# Altium PCB HandPCB.PcbDoc
Units mil, origin at the board's own origin, x right, y up, seen from the top; angles counter-clockwise.
Board outline 3543.31 x 1181.1 mil, 2 copper layers (Top Layer, Bottom Layer); 30 components, 21 nets, 97 pads, 13 vias.
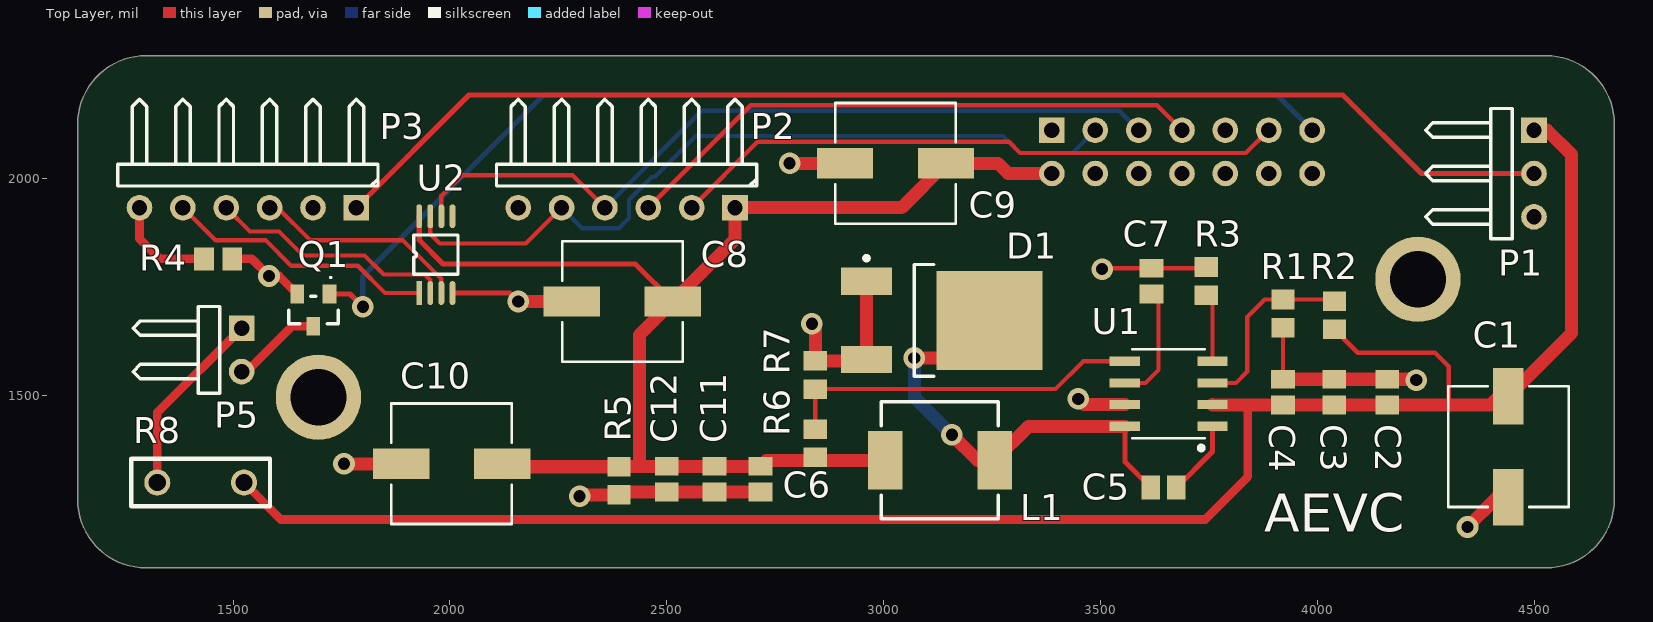
[diagram p0: Top Layer view]
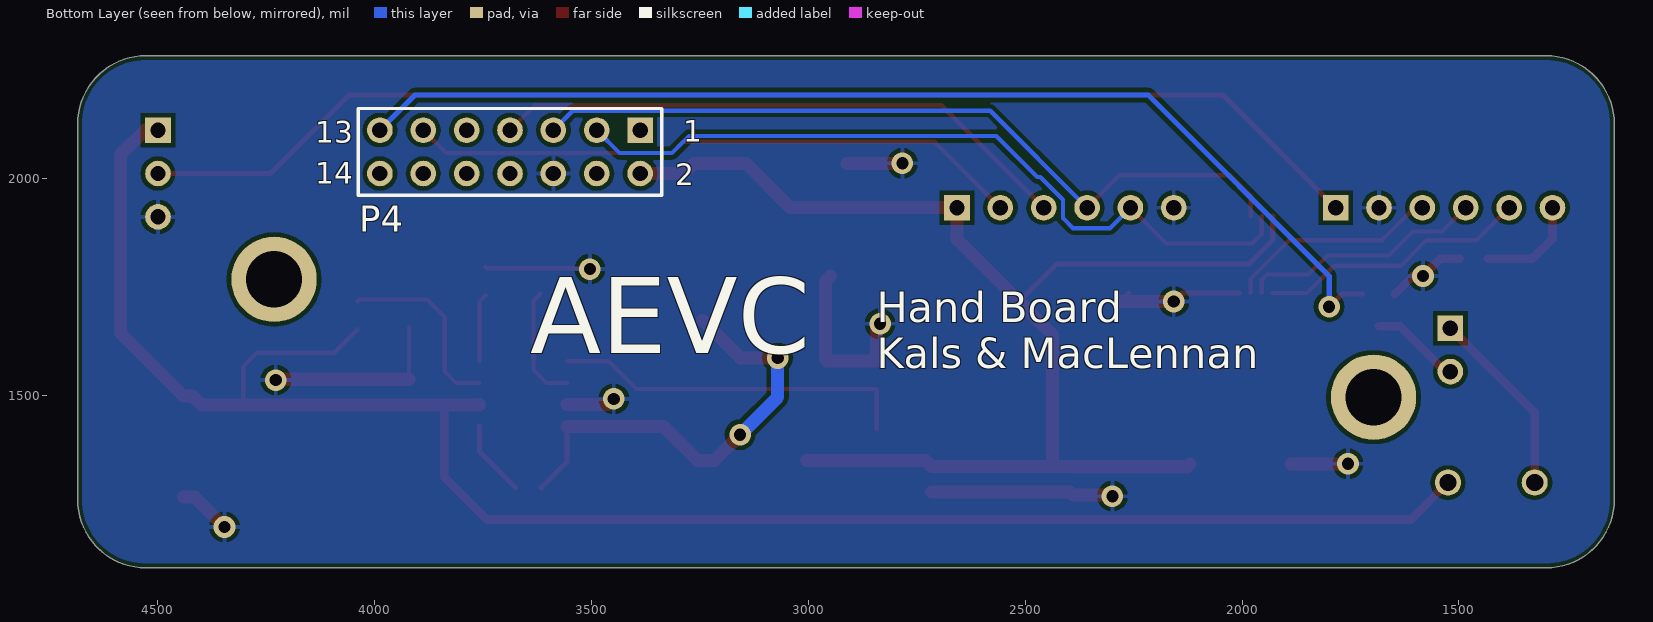
[diagram p1: Bottom Layer view, seen from below]

## Layer stack, top to bottom
Top Solder: solder mask 0.4, Solder Resist, Dk 3.5
Top Layer: signal copper 1.4
Dielectric 1: dielectric 12.6, FR-4, Dk 4.8
Bottom Layer: signal copper 1.4
Bottom Solder: solder mask 0.4, Solder Resist, Dk 3.5

## Board outline
1141.73,1259.84 ccw(c1299.21,1259.84) 1299.21,1102.36 4527.56,1102.36 ccw(c4527.56,1259.84) 4685.04,1259.84 4685.04,2125.98 ccw(c4527.56,2125.98) 4527.56,2283.46 1299.21,2283.46 ccw(c1299.21,2125.98) 1141.73,2125.98

## Design rules (kind name [scope] priority, off if disabled: settings)
BoardOutlineClearance [All] p1: gap=10 ignorepadtopadclearanceinfootprint=FALSE except(0: Arc-SplitContinuation Track-SplitContinuation SMDPad-SplitContinuation THPad-SplitContinuation Via-SplitContinuation Fill-SplitContinuation Poly-SplitContinuation Region-SplitContinuation Text-SplitContinuation)
Clearance [All] p1: gap=10 ignorepadtopadclearanceinfootprint=FALSE except(0: Arc-Hole Track-Hole SMDPad-Hole THPad-Hole Via-Hole Fill-Hole Poly-Hole Region-Hole Text-Hole)
PolygonConnect [All] p1: connectstyle=Relief reliefconductorwidth=10 reliefentries=4 polygonreliefangle="90 Angle" airgapwidth=10
RoutingVias [All] p1: holewidth=28 width=50 viastyle="Through Hole" minholewidth=28 minwidth=50 maxholewidth=28 maxwidth=50
SolderMaskExpansion [All] p1: expansion=4
Width [All] p1: maxlimit=60 minlimit=10 preferedwidth=10
30 further rules are at their usual default settings.

## Classes and differential pairs
component class U_POS5V: C10 C11 C12 R5 R6 R7
component class U_LMR14050_mod: C1 C2 C3 C4 C5 C6 C7 D1 L1 R1 R2 R3 U1
component class Main: C8 C9 P1 P2 P3 P4 P5 Q1 R4 R8 U2

## Components (designator, comment, footprint, x,y, rotation, side; value= is the part's Value field where it differs from the comment)
C1 "EEEFK1V680XP" CAP_EEFK_D8 4440.94,1381.89 r270 top value=82uF
C2 "Cap" C0805 4161.42,1507.87 r270 top value=10µF
C3 "Cap" C0805 4039.37,1507.87 r270 top value=10µF
C4 "Cap" C0805 3921.26,1507.87 r270 top value=0.1µF
C5 "Cap" C0805 3645.67,1287.4 r0 top value=0.1µF
C6 "Cap" C0805 2716.54,1307.09 r90 top value=0.1µF
C7 "Cap" C0805 3618.11,1763.78 r270 top value=22µF
C8 "EEEFK1V680XP" CAP_EEFK_D8 2397.64,1716.54 r180 top value=82uF
C9 "EEEFK1V680XP" CAP_EEFK_D8 3027.56,2035.43 r180 top value=82uF
C10 "EEEFK1V680XP" CAP_EEFK_D8 2003.94,1342.52 r180 top value=82uF
C11 "Cap" C0805 2610.24,1307.09 r90 top value=10µF
C12 "Cap" C0805 2500,1307.09 r90 top value=10µF
D1 "MBRD835LG" ONSC-DPAK-3-369C-01_V 3133.86,1673.23 r0 top
L1 "Ind" IHLP-2525C7 3129.92,1350.39 r180 top value=3.3µH
P1 "Header 3H" HDR1X3H 4500,2111.81 r270 top
P2 "Header 6H" HDR1X6H 2657.48,1933.07 r180 top
P3 "Header 6H" HDR1X6H 1784.25,1933.07 r180 top
P4 "Header 7X2" HDR2X7 3388.19,2111.81 r0 bottom
P5 "Header 2H" HDR1X2H 1519.69,1655.12 r270 top
Q1 "ZXMS6004FFTA" DIOD-SOT23F-3_V 1685.04,1696.85 r270 top
R1 "Res" R0805 4039.37,1685.04 r270 top value=39k
R2 "Res" R0805 3921.26,1688.98 r90 top value=10k
R3 "Res" R0805 3744.09,1763.78 r270 top value=33k
R4 "Res" R0805 1465.55,1814.96 r180 top value=1k
R5 "Res" R0805 2389.76,1303.15 r90 top value=1k
R6 "Res" R0805 2842.52,1389.76 r270 top value=15k
R7 "Res" R0805 2842.52,1547.24 r270 top value=2.7k
R8 "Power Resistor" MP915 1425.2,1299.21 r0 top
U1 "LMR14050SDDAR" DDA8 3657.48,1503.94 r180 top value=Value
U2 "PCA9553DP" TSSOP8 1929.13,1736.22 r90 top

## Footprints (in the part's own frame and the unit in brackets; to place one, negate y for a bottom-side part, rotate by r counter-clockwise, add the part's x,y. Pads: shape width x height; smd on the part's side, far side on the other; paste and mask are expansions set on the pad)
C0805 [mm] "Chip Capacitor, Body 2.0x1.3mm, IPC High Density"
  rect 1.1x1.4 smd: 1(-0.75,0) 2(0.75,0)
  body extent -1.1,-0.72 1.1,0.72, height 1.4
CAP_EEFK_D8 [mil]
  rect 130x70 smd paste+0 mask+0: 1(-116.5,0) 2(116.5,0)
  silkscreen extent -139,-139 139,139, body extent -154,-134 154,134, height 317
DDA8 [mil]
  rect 70x21 smd paste+0 mask+0: 1(-101,75) 2(-101,25) 3(-101,-25) 4(-101,-75) 5(101,-75) 6(101,-25) 7(101,25) 8(101,75)
  silkscreen extent -84,-103 84,130, body extent -122,-100 122,100, height 66
DIOD-SOT23F-3_V [mm] "SOTFL, 3-Leads, Body 2.9x1.6mm, Pitch 0.95mm"
  rect 1.11x0.8 smd: 1(-0.945,0.95) 2(-0.945,-0.95) 3(0.945,0)
  silkscreen extent -1.96,-1.45 0.8,1.45, body extent -1.2,-1.45 1.2,1.45, height 1
HDR1X2H [mm] "Connector; Header; 2 Position; Right Angle"
  rect 1.5x1.5 hole 0.9: 1(0,0)
  round 1.5 hole 0.9: 2(2.54,0)
  silkscreen extent -1.27,-6.35 3.81,-1.27
HDR1X3H [mm] "Connector; Header; 3 Position; Right Angle"
  rect 1.5x1.5 hole 0.9: 1(0,0)
  round 1.5 hole 0.9: 2(2.54,0) 3(5.08,0)
  silkscreen extent -1.27,-6.35 6.35,-1.27
HDR1X6H [mm] "Connector; Header; 6 Position; Right Angle"
  rect 1.5x1.5 hole 0.9: 1(0,0)
  round 1.5 hole 0.9: 2(2.54,0) 3(5.08,0) 4(7.62,0) 5(10.16,0) 6(12.7,0)
  silkscreen extent -1.27,-6.35 13.97,-1.27
HDR2X7 [mm] "Connector; Header; 7x2 Position"
  rect 1.5x1.5 hole 0.9: 1(0,0)
  round 1.5 hole 0.9: 2(0,2.54) 3(2.54,0) 4(2.54,2.54) 5(5.08,0) 6(5.08,2.54) 7(7.62,0) 8(7.62,2.54) 9(10.16,0) 10(10.16,2.54) 11(12.7,0) 12(12.7,2.54) 13(15.24,0) 14(15.24,2.54)
  silkscreen extent -1.27,-1.27 16.51,3.81
IHLP-2525C7 [mm]
  rect 2.02x3.429 smd: 1(-3.2,0) 2(3.2,0)
  silkscreen extent -3.43,-3.43 3.43,3.43, body extent -3.54,-3.3 3.54,3.37, height 2.89
MP915 [mil]
  round 60 hole 40: 1(-100,0) 2(100,0)
  silkscreen extent -160,-55 160,55
ONSC-DPAK-3-369C-01_V [mm] "DPAK, 3-Leads, Body 6.54x6.095mm, Pitch 2.29mm"
  rect 3x1.6 smd: 1(-4.4,2.29) 3(-4.4,-2.29)
  rect 6.2x5.8 smd: 4(2.8,0)
  silkscreen extent -4.52,-3.27 -0.45,3.76, body extent -1.6,-3.27 4.49,3.27, height 2.38
R0805 [mm]
  rect 1.15x1.35 smd: 1(-0.825,0) 2(0.825,0)
  body extent -1.05,-0.67 1.05,0.67, height 0.9
TSSOP8 [mm]
  rect 1.4x0.34 smd: 1(0,0)
  oval 1.4x0.34 smd: 2(0,-0.65) 3(0,-1.3) 4(0,-1.95) 5(4.5,-1.95) 6(4.5,-1.3) 7(4.5,-0.65) 8(4.5,0)
  silkscreen extent 1.1,-2.28 3.4,0.33

## Part data
C1 C8 C9 C10: "Polarized Capacitor (Surface Mount)", Supplier Part Number 1=P18960DKR-ND, Built_By=EMA_UL_Team, C="Copyright (C) 2015 Accelerated Designs. All rights reserved", Manufacturer_Part_Number=EEEFK1V680XP, Supplier 1=Digi-Key, Vendor=Panasonic
C2 C3 C4 C5 C6 C7 C11 C12: "capacitor"
D1: library part CMP-1055-00169-1, "SWITCHMODE(TM) Power Rectifier, 3-Pin DPAK, Pb-Free, Tube", Manufacturer="On Semiconductor", ComponentLink1Description="Manufacturer URL", ComponentLink1URL=http://www.onsemi.com/, ComponentLink2Description=Datasheet, ComponentLink2URL=http://www.onsemi.cn/pub_link/Collateral/MBRD835L-D.PDF, ComponentLink3Description="Package Specification", ComponentLink3URL=http://www.onsemi.cn/pub_link/Collateral/369C.PDF, Configuration=Single, DatasheetVersion="Rev. 11", IFSM Max (A)=75, Mounting Technology="Surface Mount", PackageDescription="3-Pin Flange Mount, Body 6.54 x 6.095 mm, Pitch 2.29 mm", PackageReference=DPAK-3-369C-01, PackageVersion="Rev. E, 02/2014", Packing=Tube, PartNumber=MBRD835LG, RoHS=TRUE
L1: "Inductor", Supplier Part Number 1=541-2580-1-ND, Supplier 1=Digi-Key
P1: "Header, 3-Pin, Right Angle", LatestRevisionDate=17-Jul-2002, LatestRevisionNote="Re-released for DXP Platform.", Publisher="Altium Limited"
P2 P3: "Header, 6-Pin, Right Angle", LatestRevisionDate=17-Jul-2002, LatestRevisionNote="Re-released for DXP Platform.", Publisher="Altium Limited"
P4: "Header, 7-Pin, Dual row", LatestRevisionDate=17-Jul-2002, LatestRevisionNote="Re-released for DXP Platform.", Publisher="Altium Limited"
P5: "Header, 2-Pin, Right Angle", LatestRevisionDate=17-Jul-2002, LatestRevisionNote="Re-released for DXP Platform.", Publisher="Altium Limited"
Q1: library part CMP-2000-07435-1, "N-Channel Self Protected Enhancement Mode Intellifet(TM) MOSFET, 60 V, 1.3 A, -40 to 150 degC, 3-Pin SOT23, RoHS, Tape and Reel", Current - Output (Max)=1.3A, Manufacturer="Diodes Inc", Operating Temperature=-40°C~150°C(TJ), Package / Case=SOT-23-3FlatLeads, Package Description="3-Pin Small Outline Transistor Flat Lead, Body 2.9 x 1.6 mm, Pitch 0.95 mm", Package Reference=SOT23F-3, Standard Package=3,000, Supplier Device Package=SOT-23F, Voltage - Load=60V(Max), Voltage - Supply (Vcc/Vdd)=3.3V,5V, Category=IntegratedCircuits(ICs), Datasheet URL=https://datasheet.ciiva.com/15109/getdatasheetpartid-411522-15109086.pdf, Datasheet Version="Rev. 6-2, 10/2014", Family=PMIC-PowerDistributionSwitches,LoadDrivers, Fault Protection=CurrentLimiting(Fixed),OverTemperature,OverVoltage, Featured Product=ZXMS6004FF60VN-ChannelMOSFET, Features=AutoRestart, Input Type=Non-Inverting, Interface=On/Off, Manufacturer URL=http://www.diodes.com/, Mounting Technology=SurfaceMount, Number of Outputs=1, Online Catalog=GeneralPurpose, Other Names=ZXMS6004FFTR, Output Configuration=LowSide, Output Type=N-Channel, Packaging=Tape&Reel(TR), PCN Design/Specification=PartMarkingUpdate25/Sep/2015, Product Training Modules=IntelliFET's, Ratio - Input=Output:1:1, Rds On (Typ)=350mOhm, RoHS Information=RoHSCertofCompliance, Series=Automotive,AEC-Q101,INTELLIFET®, Switch Type=GeneralPurpose
R1 R2 R3 R4 R5 R6 R7: "resistor"
R8: library part MP915-40.0-1%, Supplier Part Number 1=MP915-40.0F-ND, Supplier 1=Digi-Key
U1: "dc-dc converter", Supplier Part Number 1=296-41103-5-ND, Built_By=EMA_UL_Team, C="Copyright (C) 2016 Accelerated Designs. All rights reserved", Manufacturer_Part_Number=LMR14050SDDAR, RefDes=RefDes, Supplier 1=Digi-Key, Type=Type, Vendor="Texas Instruments"
U2: "LED Driver, I2C", Supplier Part Number 1=568-3392-6-ND, Supplier 1=Digi-Key

## Free pads (board coordinates)
  round 196.85 hole 129.92 unplated: 1(1696.85,1496.06) 1(4232.28,1767.72)

## Via types
v1: diameter 50, hole 28, Top Layer to Bottom Layer, 13 vias

## Nets (pads, with @x,y where several pads share a name; then routed paths per layer and width w, separated by ;. In a path a pad name is that pad's centre, name@x,y a point inside that pad or via, vN(x,y) a via of type N, cw(c..) or ccw(c..) an arc to the next point about the centre after c; other vN are vias at no path point)
EN: P2.2 P4.11 | length 1426.6
  Top Layer w10: P2.2 2709.84,2085.43 3288.58,2085.43 3314.96,2059.06 3835.43,2059.06 P4.11
GND: C1.2 C2.1 C3.1 C4.1 C6.1 C7.1 C8.2 C9.2 C10.2 C11.1 C12.1 D1.1 D1.3 P1.3 P2.6 P3.2 P4.6 Q1.2 R2.1 R3.1 R4.1 R5.1 R7.1 U1.7 U2.4 | length 2485.7
  Top Layer w10: v1(3503.94,1791.34) 3505.91,1793.31 C7.1 3741.14,1793.31 R3.1 ; C4.1 R2.1
  Top Layer w12: U2.4 2137.8,1736.22 v1(2157.48,1716.54) ; C8.2@2261.45,1736.22 C8.2
  Top Layer w20: R4.1 1543.31,1814.96 v1(1582.68,1775.59) 1606.1,1775.59 Q1.2
  Top Layer w30: v1(1755.91,1342.52) C10.2 ; v1(2157.48,1716.54) C8.2 ; v1(2299.21,1267.72) 2302.17,1270.67 R5.1 2396.65,1277.56 C12.1 C11.1 C6.1 ; v1(2783.46,2035.43) C9.2 ; v1(2834.65,1665.35) 2842.52,1657.48 R7.1 2957.28,1579.72 D1.3 D1.1 D1.1@2948.62,1775.39 ; v1(3448.82,1492.13) 3462.01,1478.94 U1.7 ; C4.1 C3.1 C2.1 4226.38,1537.4 v1(4228.35,1535.43) ; v1(4346.46,1196.85) 4415,1265.39 C1.2
I2C_SCL: P2.4 P4.5 U2.6 | length 1816.6
  Top Layer w10: U2.6 1980.32,1960.63 2027.56,2007.87 2282.68,2007.87 P2.4
  Bottom Layer w10: P2.4 2580.75,2156.34 3543.66,2156.34 P4.5
I2C_SDA: P2.5 P4.3 U2.7 | length 1788.7
  Top Layer w10: U2.7 1954.72,1872.05 1976.38,1850.39 2174.8,1850.39 P2.5
  Bottom Layer w10: P2.5 2304.72,1885.83 2389.76,1885.83 2412.95,1909.02 2412.95,1951.51 2465.38,2003.94 2472.44,2003.94 2566.93,2098.43 3275.59,2098.43 3314.96,2059.06 3435.43,2059.06 P4.3
LED_B: P3.4 U2.2 | length 569.5
  Top Layer w10: P3.4 1539.06,1878.27 1605.98,1878.27 1661.42,1822.83 1803.15,1822.83 1847.2,1778.78 1942.04,1778.78 1954.72,1766.1 U2.2
LED_COMM: P3.6 R4.2 | length 239.7
  Top Layer w20: P3.6 1284.25,1861.42 1330.71,1814.96 R4.2
LED_EN: P4.13 Q1.1 | length 2555.2
  Top Layer w12: Q1.1 1769.88,1734.06 v1(1799.21,1704.72)
  Bottom Layer w12: v1(1799.21,1704.72) 1799.21,1775.59 2216.54,2192.91 3907.09,2192.91 P4.13
LED_G: P3.5 U2.1 | length 626.4
  Top Layer w10: P3.5 1459.06,1858.27 1574.8,1858.27 1633.86,1799.21 1787.4,1799.21 1850.39,1736.22 U2.1
LED_GND: P5.2 Q1.3 | length 208.7
  Top Layer w20: P5.2 1531.5,1555.12 1636.02,1659.65 Q1.3
LED_R: P3.3 U2.3 | length 496.7
  Top Layer w10: P3.3 1602.36,1933.07 1677.17,1858.27 1890.84,1858.27 1980.32,1768.79 U2.3
LED_VDD: P5.1 R8.1 | length 436.5
  Top Layer w20: R8.1 1325.2,1460.63 P5.1
MODE: P2.3 P4.7 | length 1352.4
  Top Layer w10: P2.3 2693.7,2169.29 3630.71,2169.29 P4.7
NetC5_1: C5.1 D1.4 L1.1 U1.8 | length 1044.4
  Top Layer w12: U1.8 3556.48,1347.06 C5.1
  Top Layer w30: v1(3070.87,1586.61) 3157.48,1586.61 D1.4 ; v1(3157.48,1409.45) 3216.54,1350.39 L1.1 3334.45,1428.94 U1.8
  Bottom Layer w30: v1(3070.87,1586.61) 3070.87,1496.06 v1(3157.48,1409.45)
NetC5_2: C5.2 U1.1 | length 176
  Top Layer w12: C5.2 3758.48,1370.68 U1.1
NetC7_2: C7.2 U1.6 | length 271.6
  Top Layer w10: U1.6 3603.74,1528.94 3633.86,1559.06 3633.86,1718.5 C7.2
NetR1_1: R1.1 R2.2 U1.3 | length 436.1
  Top Layer w10: U1.3 3812.4,1528.94 3838.58,1555.12 3838.58,1681.1 3878.94,1721.46 R2.2 4035.43,1721.46 R1.1
NetR3_2: R3.2 U1.4 | length 158.3
  Top Layer w10: R3.2 3758.48,1716.91 U1.4
NetR6_1: R6.1 R7.2 U1.5 | length 833.1
  Top Layer w10: R6.1 R7.2 3396.65,1514.76 3460.83,1578.94 U1.5
POS5V: C6.2 C8.1 C9.1 C10.1 C11.2 C12.2 L1.2 P2.1 P4.2 R5.2 R6.2 U2.8 | length 3062
  Top Layer w12: U2.8 1929.13,1858.27 1984.25,1803.15 2427.52,1803.15 C8.1
  Top Layer w30: C10.1 2127.33,1335.63 R5.2 2390.75,1336.61 2437.01,1336.61 ; L1.2 2730.31,1350.39 C6.2 C11.2 C12.2 2437.01,1336.61 ; P4.2 3287.4,2011.81 3263.78,2035.43 C9.1 3041.7,1933.07 P2.1 2657.48,1859.88 C8.1 2437.01,1639.41 2437.01,1336.61
SW_NO: P1.2 P3.1 | length 2898.4
  Top Layer w12: P3.1 2044.09,2192.91 4059.06,2192.91 4240.16,2011.81 P1.2
VCC: C1.1 C2.2 C3.2 C4.2 P1.1 R1.2 R8.2 U1.2 | length 4362.7
  Top Layer w10: R1.2 4093.5,1598.43 4271.65,1598.43 4303.15,1566.93 4303.15,1478.35
  Top Layer w20: R8.2 1610.24,1214.17 3741.73,1214.17 3840.17,1312.61 3840.17,1478.35
  Top Layer w30: U1.2 3759.07,1478.35 3840.17,1478.35 C4.2 C3.2 C2.2 4303.15,1478.35 4399.61,1478.35 4419.65,1498.39 C1.1 4586.61,1644.06 4586.61,2055.12 4529.92,2111.81 P1.1
pads on no net: P4.1 P4.4 P4.8 P4.9 P4.10 P4.12 P4.14 U2.5

## Polygon pours and split planes (outlines as drawn)
GND on Bottom Layer "Bottom Layer-SW_COMM" (solid, pour order 0): 1141.73,1102.36 1141.73,2283.46 4685.04,2283.46 4685.04,1102.36

## Silkscreen, mask and mechanical layers (free items; w line width, h text height)
Top Overlay:
  text "AEVC" at 3877.95,1157.48 h150
Bottom Overlay:
  text "Hand Board" at 2842.52,1645.67 h120
  text "Kals & MacLennan" at 2842.52,1539.37 h120
  text "AEVC" at 3641.73,1539.37 h300
Mechanical 1:
  the board outline again, w0.5

## Text inside footprints (layer, text, board x,y; h text height)
P4: Bottom Overlay "2" at 3307.09,1984.25 h50; Bottom Overlay "1" at 3288.58,2085.43 h50; Bottom Overlay "14" at 4137.8,1988.19 h50; Bottom Overlay "13" at 4137.8,2082.68 h50